# Altium PCB LM25116.PcbDoc
Units mm, origin at the board's own origin, x right, y up, seen from the top; angles counter-clockwise.
Board outline 66.8 x 87.88 mm, 2 copper layers (Top Layer, Bottom Layer); 113 components, 49 nets, 281 pads, 504 vias.
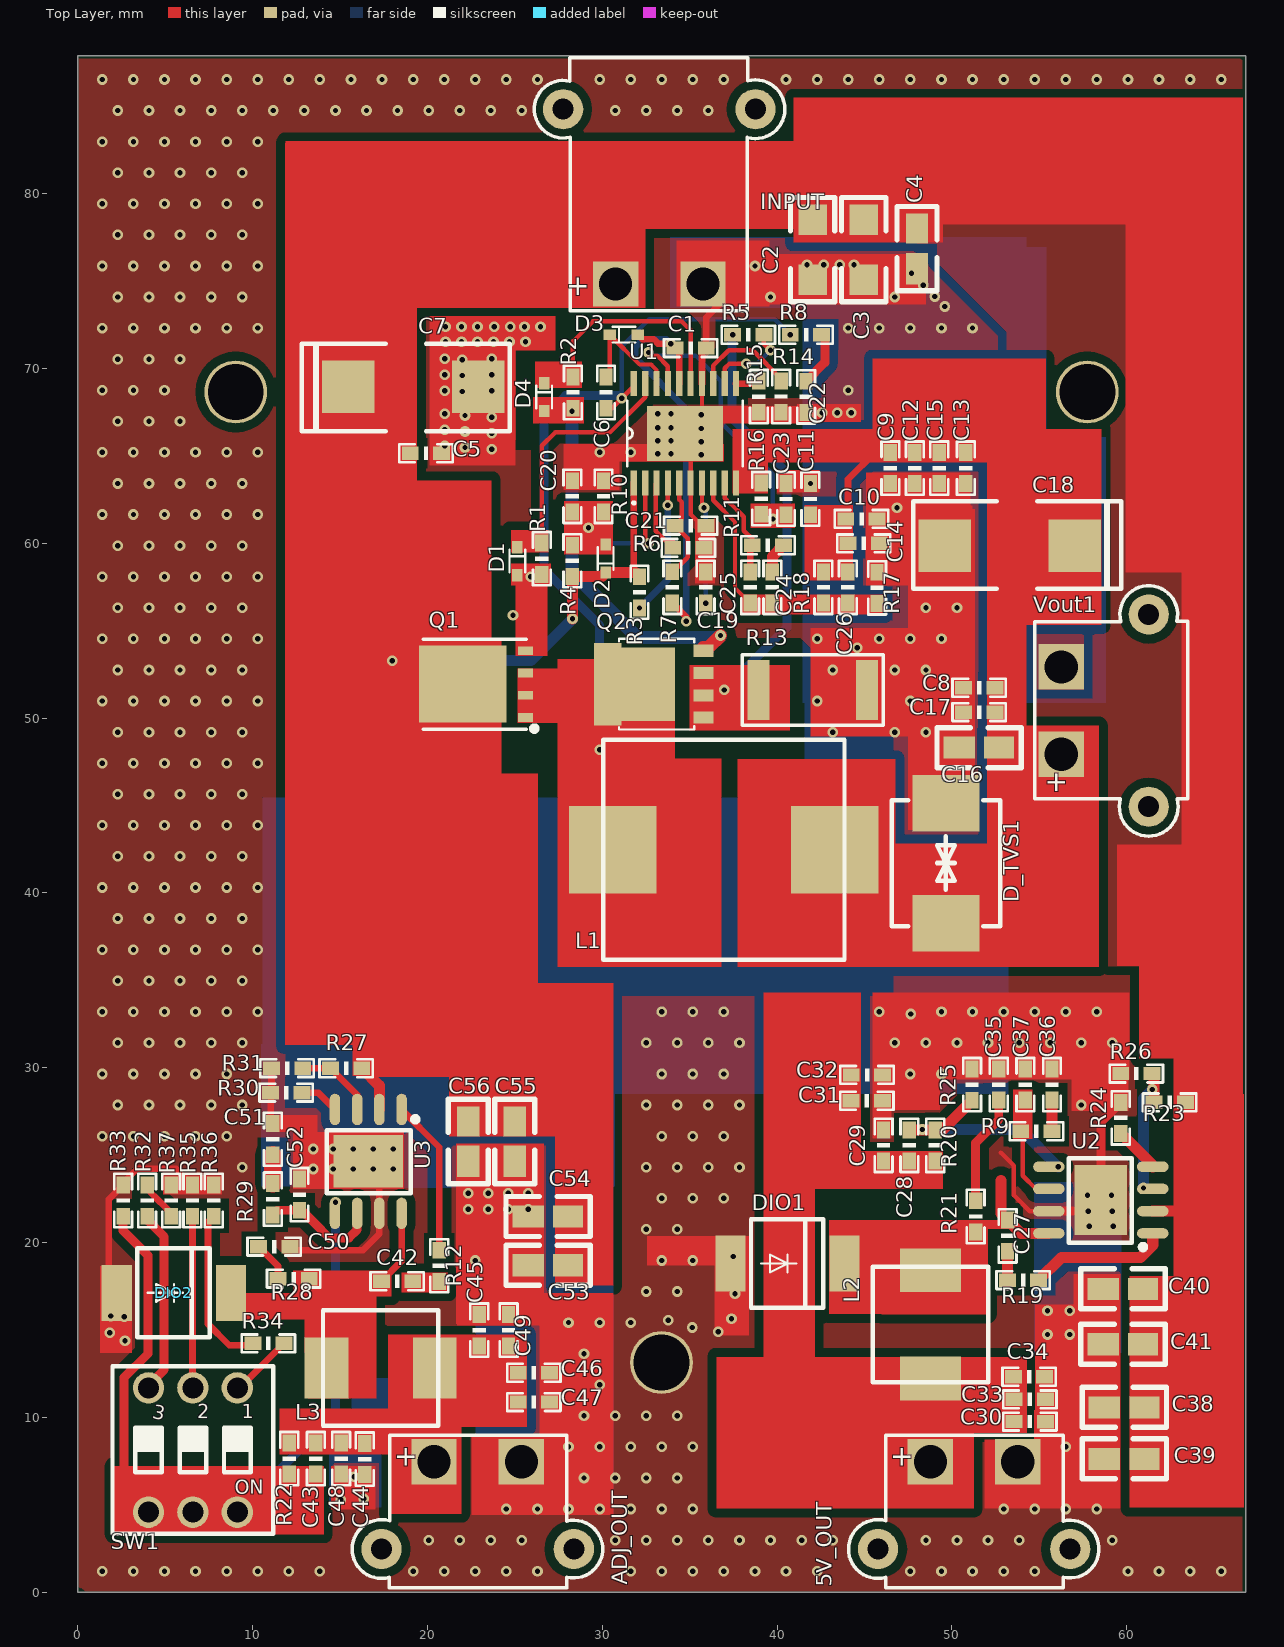
[diagram p0: Top Layer view]
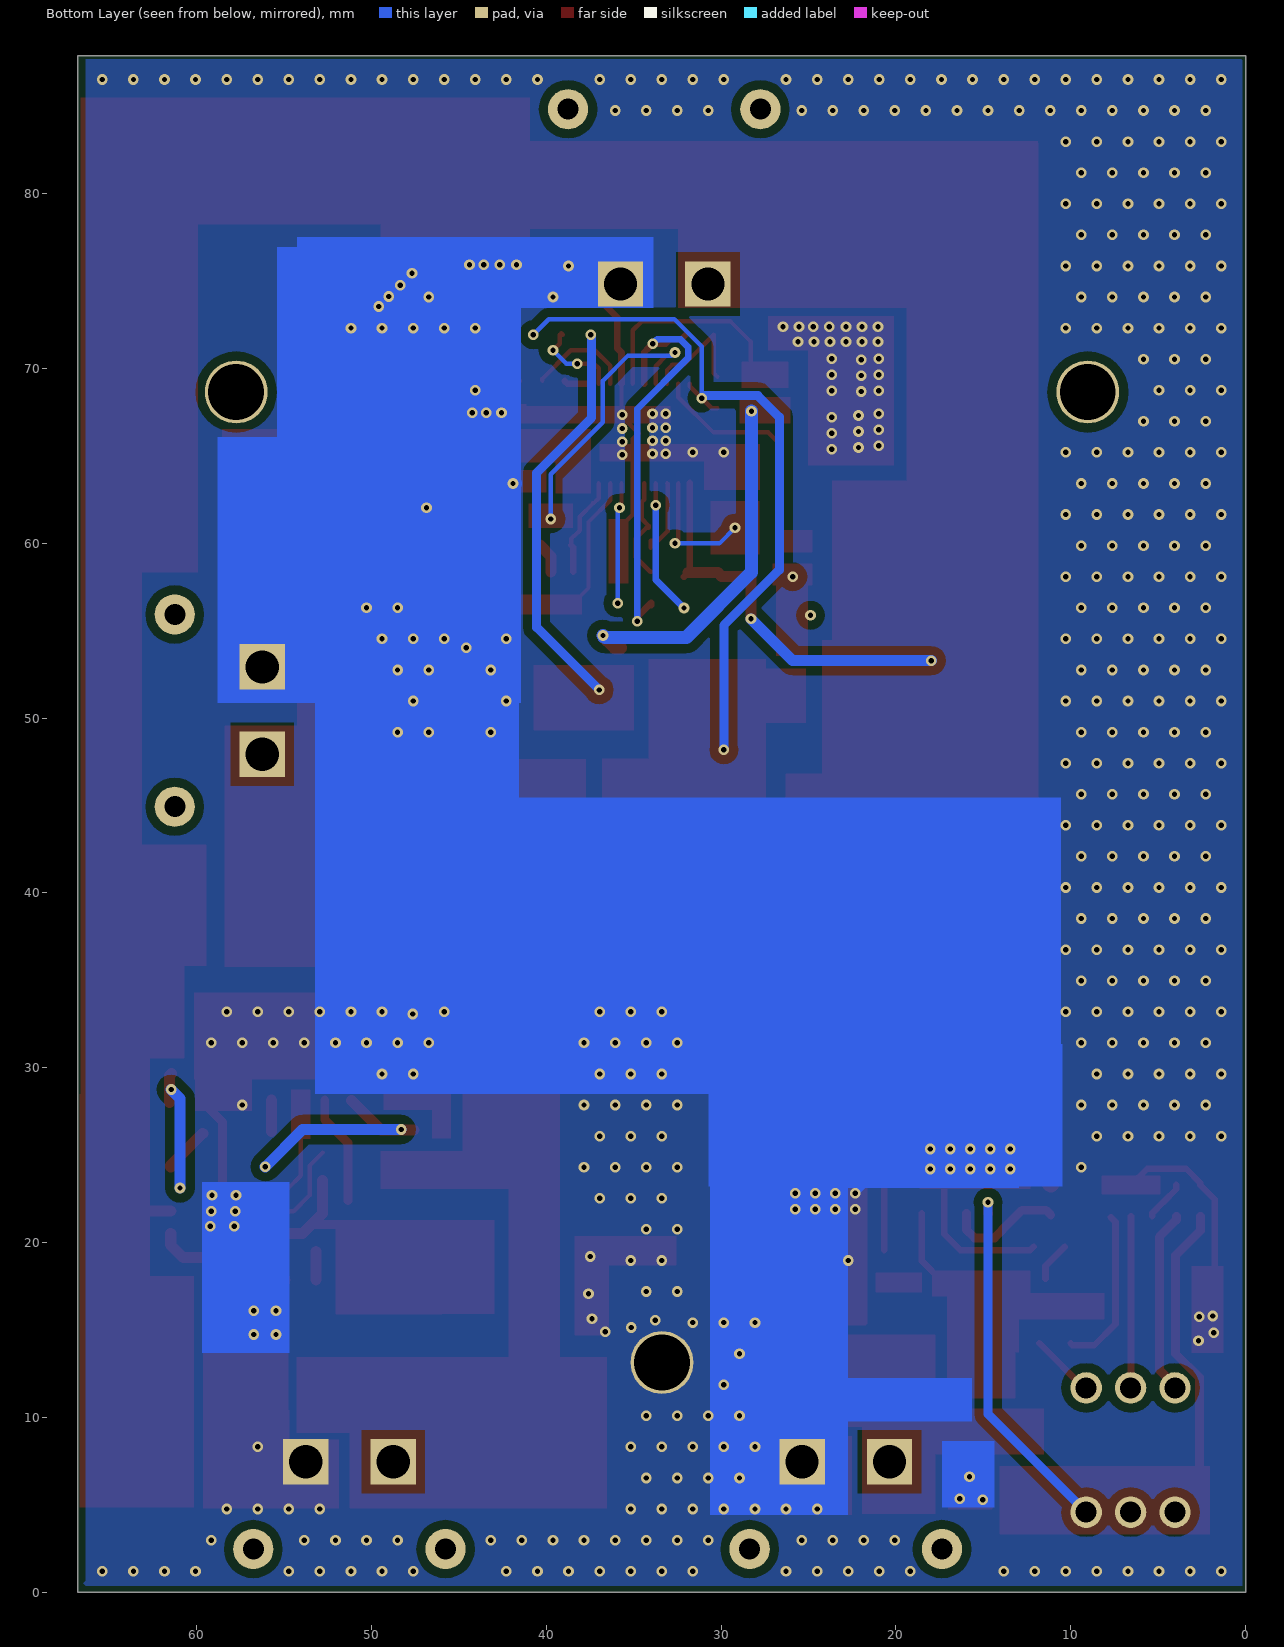
[diagram p1: Bottom Layer view, seen from below]

## Layer stack, top to bottom
Top Solder: solder mask 0.0102, Solder Resist, Dk 3.5
Top Layer: signal copper 0.0356
Dielectric 1: dielectric 0.32, FR-4, Dk 4.8
Bottom Layer: signal copper 0.0356
Bottom Solder: solder mask 0.0102, Solder Resist, Dk 3.5

## Board outline
0,0 66.802,0 66.802,87.884 0,87.884

## Design rules (kind name [scope] priority, off if disabled: settings)
Clearance [InPolygon] p1: gap=0.508 ignorepadtopadclearanceinfootprint=TRUE except(0: Arc-Hole Track-Hole SMDPad-Hole THPad-Hole Via-Hole Fill-Hole Poly-Hole Region-Hole Text-Hole)
Clearance Clearance_1 [All] p2: gap=0.254 ignorepadtopadclearanceinfootprint=TRUE except(0: Arc-Hole Track-Hole SMDPad-Hole THPad-Hole Via-Hole Fill-Hole Poly-Hole Region-Hole Text-Hole)
DiffPairsRouting [All] p1: maxlimit=2.54 minlimit=0.381 mostfreqgap=0.381 toplayer_minwidth=0.254 toplayer_maxwidth=0.762 toplayer_prefwidth=0.508 bottomlayer_minwidth=0.254 bottomlayer_maxwidth=0.762 bottomlayer_prefwidth=0.508 maxuncoupledlength=12.7
PlaneConnect [All] p1: planeconnectstyle=Direct reliefexpansion=0.762 reliefentries=4 reliefconductorwidth=254 reliefairgap=0.508
PolygonConnect [All] p1: connectstyle=Direct reliefconductorwidth=2539.975 reliefentries=4 polygonreliefangle="90 Angle" airgapwidth=0.508
RoutingVias [All] p1: holewidth=0.61 width=1.219 viastyle="Through Hole" minholewidth=0.61 minwidth=1.219 maxholewidth=1.219 maxwidth=2.438
SolderMaskExpansion [All] p1: expansion=0.102
Width [All] p1: maxlimit=2539.975 minlimit=0.254 preferedwidth=0.381
28 further rules are at their usual default settings.

## Components (designator, comment, footprint, x,y, rotation, side; value= is the part's Value field where it differs from the comment)
5V_OUT "Vout" XT30_PW公头 48.768,7.46 r0 top value=N/A (schematic designator Vout3)
ADJ_OUT "Vout" XT30_PW公头 20.371,7.46 r0 top value=N/A (schematic designator Vout4)
C1 "1uF" 0603P 35.052,71.171 r0 top
C2 "4.7uF" 1206 42.037,75.082 r90 top
C3 "4.7uF" 1206 44.958,75.082 r90 top
C4 "1uF" 0805 48.006,75.717 r90 top
C5 "100nF" 0603P 19.914,65.151 r180 top
C6 "1uF" 0603P 30.213,68.631 r270 top
C7 "22uF" 22UF 22.911,68.961 r180 top
C8 "22uF" 0603P 51.562,51.74 r0 top
C9 "22uF" 0603P 46.48,64.303 r90 top
C10 "22uF" 0603P 44.831,61.392 r180 top
C11 "22uF" 0603P 41.91,62.535 r270 top
C12 "22uF" 0603P 47.877,64.303 r90 top
C13 "22uF" 0603P 50.798,64.303 r90 top
C14 "22uF" 0603P 44.958,59.995 r180 top
C15 "22uF" 0603P 49.274,64.303 r90 top
C16 "1uF" 0805 50.419,48.312 r0 top
C17 "100nF" 0603P 51.562,50.343 r0 top
C18 "22uF" 22UF 49.581,59.868 r0 top
C19 "10nF" 0603P 35.911,57.478 r270 top
C20 "1uF" 0603P 28.291,62.685 r270 top
C21 "270pF" 0603P 35.052,61.011 r180 top
C22 "470pF" 0603P 41.656,68.377 r90 top
C23 "1uF" 0603P 40.513,62.535 r270 top
C24 "3.3nF" 0603P 39.731,57.477 r270 top
C25 "100pF" 0603P 38.461,57.477 r270 top
C26 "330pF" 0603P 44.049,57.477 r270 top
C27 "100nF" 0603P 53.186,20.384 r90 top
C28 "470pF" 0603P 47.569,25.552 r270 top
C29 "100nF" 0603P 46.091,25.552 r270 top
C30 "22uF" 0603P 54.458,9.754 r180 top
C31 "22uF" 0603P 45.136,28.107 r180 top
C32 "22uF" 0603P 45.146,29.585 r180 top
C33 "22uF" 0603P 54.458,11.024 r180 top
C34 "22uF" 0603P 54.417,12.317 r180 top
C35 "100pF" 0603P 52.68,29.032 r90 top
C36 "4.7nF" 0603P 55.728,29.032 r90 top
C37 "47pF" 0603P 54.204,29.032 r90 top
C38 "4.7uF" 0805 58.725,10.568 r0 top
C39 "4.7uF" 0805 58.725,7.622 r0 top
C40 "4.7uF" 0805 58.649,17.348 r0 top
C41 "4.7uF" 0805 58.649,14.175 r0 top
C42 "100nF" 0603P 18.263,17.78 r180 top
C43 "470pF" 0603P 13.613,7.635 r90 top
C44 "100nF" 0603P 16.407,7.61 r90 top
C45 "22uF" 0603P 22.962,14.986 r270 top
C46 "22uF" 0603P 26.086,12.546 r180 top
C47 "22uF" 0603P 26.086,10.87 r180 top
C48 "22uF" 0603P 15.059,7.635 r90 top
C49 "22uF" 0603P 24.638,14.986 r270 top
C50 "100pF" 0603P 11.227,19.761 r0 top
C51 "4.7nF" 0603P 11.151,25.908 r90 top
C52 "47pF" 0603P 12.675,22.733 r90 top
C53 "4.7uF" 0805 25.756,18.696 r0 top
C54 "4.7uF" 0805 25.756,21.49 r0 top
C55 "4.7uF" 0805 24.992,24.638 r90 top
C56 "4.7uF" 0805 22.325,24.638 r90 top
D1 "BAS516,115" SOD-523 25.146,58.979 r270 top
D2 "BAS516,115" SOD-523 30.196,59.129 r90 top
D3 "BAS516,115" SOD-523 31.229,71.933 r0 top
D4 "BAS516,115" SOD-523 26.67,68.362 r270 top
D_TVS1 "SMCJ12CA_C310007" TVS 49.657,45.136 r270 top
DIO1 "SK86" SMC(DO-214AB) 40.589,18.796 r0 top
DIO2 "SK86" SMC(DO-214AB) 5.486,17.12 r0 top
INPUT "WB_BATTERY" XT30_PWĸͷ 35.76,74.836 r180 top value=N/A (schematic designator Vin1)
L1 "10uH 10A" "10UH 10A" 30.605,42.47 r0 top
L2 "6.8uH-4.5A" "6.8UH 4.5A" 48.781,18.413 r270 top
L3 "6.8uH-4.5A" "6.8UH 4.5A" 14.221,12.827 r0 top
Q1 "BSC067N06LS3G" BSC067N06LS3G 25.603,50.037 r90 top
Q2 "PSMN1R8-40YLC,115" PSMN1R8-40YLC,115 33.047,51.94 r90 top
R1 "4.7R" 0603P 26.543,59.12 r270 top
R2 "4.7R" 0603P 28.321,68.631 r270 top
R3 "1M" 0603P 32.131,57.201 r270 top
R4 "100K" 0603P 28.291,59.002 r270 top
R5 "0R" 0603P 38.354,71.933 r180 top
R6 "12.4K" 0603P 34.925,59.741 r180 top
R7 "511K" 0603P 34.006,57.478 r90 top
R8 "10R" 0603P 41.656,71.933 r180 top
R9 "17.8K" 0603P 54.839,26.365 r180 top
R10 "10K" 0603P 30.069,62.685 r270 top
R11 "17.8K" 0603P 39.477,59.89 r180 top
R12 "0R" 0603P 20.676,18.669 r270 top
R13 "4mR" LC-2512_L 42.037,51.613 r180 top
R14 "0R" 0603P 40.229,68.4 r270 top
R15 "10K" 0603P 38.958,68.39 r90 top
R16 "0R" 0603P 39.086,62.558 r270 top
R17 "1.21K" 0603P 45.72,57.455 r270 top
R18 "10.7K" 0603P 42.652,57.477 r270 top
R19 "0R" 0603P 54.075,17.844 r180 top
R20 "40.2K" 0603P 49.047,25.552 r270 top
R21 "100R" 0603P 51.359,21.488 r90 top
R22 "40.2K" 0603P 12.089,7.635 r90 top
R23 "309K" 0603P 62.459,28.016 r0 top
R24 "243K" 0603P 59.665,27.127 r270 top
R25 "7.68K" 0603P 51.156,29.032 r270 top
R26 "68K" 0603P 60.554,29.667 r0 top
R27 "309K" 0603P 15.342,29.972 r0 top
R28 "100R" 0603P 12.344,17.932 r180 top
R29 "17.8K" 0603P 11.151,22.479 r270 top
R30 "243K" 0603P 11.913,28.575 r0 top
R31 "68K" 0603P 11.963,29.974 r0 top
R32 "8.2K" 0603P 3.962,22.403 r270 top
R33 "7.68K" 0603P 2.591,22.403 r270 top
R34 "22K" 0603P 10.898,14.234 r0 top
R35 "13.3K" 0603P 6.553,22.403 r270 top
R36 "750R" 0603P 7.772,22.403 r270 top
R37 "1.2K" 0603P 5.334,22.403 r270 top
SW1 "DSWB03LHGET" CH3_SWITCH 5.309,8.382 r180 top
U1 "LM25116" MXA20A 34.727,66.292 r90 top
U2 "TPS54540DDAR" TPS54540 61.493,20.523 r180 top
U3 "TPS54540DDAR" TPS54540 18.517,27.61 r270 top
Vout1 "Vout" XT30_PW公头 56.261,47.93 r90 top value=N/A

## Footprints (in the part's own frame and the unit in brackets; to place one, negate y for a bottom-side part, rotate by r counter-clockwise, add the part's x,y. Pads: shape width x height; smd on the part's side, far side on the other; paste and mask are expansions set on the pad)
"6.8UH 4.5A" [mm]
  rect 2.5x3.5 smd: 1(0,0) 2(6.2,0)
  silkscreen extent -0.2,-3.3 6.4,3.3
"10UH 10A" [mm]
  rect 5x5 smd: 1(0,0) 2(12.702,-0.002)
  silkscreen extent -0.55,-6.3 13.25,6.3
22UF [mil]
  rect 118.07x118.5 smd: 1(293,0) 2(0,0)
  silkscreen extent -71,-97 398,100
0603P [mil]
  rect 37.87x30 smd: 1(-35,0) 2(35.39,-0.06)
  silkscreen extent -60,-20 60,20
0805 [mm]
  rect 1.8x1.27 smd: 1(0,-0.002)
  rect 1.724x1.27 smd: 2(2.286,-0.002)
  silkscreen extent -1.27,-1.14 3.56,1.14
1206 [mil]
  rect 67.87x63.94 smd: 1(0,0) 2(135,0)
  silkscreen extent -50,-50 185,50
BSC067N06LS3G [mm]
  rect 0.5x0.85 smd: 1(0,0) 2(1.27,0) 3(2.541,0) 4(3.811,0)
  rect 4.412x5 smd: 5(1.907,3.577)
  silkscreen extent -0.79,-0.66 4.48,5.85
CH3_SWITCH [mm]
  round 1.8 hole 1.2: 1(-3.81,3.81) 2(-1.27,3.81) 3(1.27,3.81) 4(-3.81,-3.302) 5(-1.27,-3.302) 6(1.27,-3.302)
  silkscreen extent -5.87,-4.55 3.33,5.05
LC-2512_L [mm]
  rect 1.25x3.42 smd: 1(-3.1,0) 2(3.1,0)
  silkscreen extent -4.03,-2.01 4.03,2.01
MXA20A [mil]
  rect 56x14 smd: 1(-112,115.16) 2(-112,89.57) 3(-112,63.98) 4(-112,38.39) 5(-112,12.8) 6(-112,-12.8) 7(-112,-38.39) 8(-112,-63.98) 9(-112,-89.57) 10(-112,-115.16) 11(112,-115.16) 12(112,-89.57) 13(112,-63.98) 14(112,-38.39) 15(112,-12.8) 16(112,12.8) 17(112,38.39) 18(112,63.98) 19(112,89.57) 20(112,115.16)
  rect 124x171 smd: 21(0,0)
  silkscreen extent -160,-130 74,130
PSMN1R8-40YLC,115 [mm]
  rect 0.7x1.15 smd: 1(-1.91,-2.735) 2(-0.64,-2.735) 3(0.64,-2.735) 4(1.91,-2.735)
  rect 4.7x1.55 smd: 5(0,2.735)
  rect 4.2x3.3 smd: 5(0,0.535)
  silkscreen extent -2.6,-2.21 2.6,2.09
SMC(DO-214AB) [mil]
  rect 67.87x126 smd: 1(-128.4,0) 2(128.4,0)
  silkscreen extent -82,-100 81,100
SOD-523 [mm]
  rect 0.7x0.6 smd: 1(-0.8,0) 2(0.8,0)
  silkscreen extent -0.65,-0.45 0.65,0.45
TPS54540 [mm]
  oval 1.8x0.6 smd: 1(0,0) 2(0,-1.27) 3(0,-2.54) 4(0,-3.81) 5(5.944,-3.81) 6(5.944,-2.54) 7(5.944,-1.27) 8(5.944,0)
  rect 3x4 smd: 9(2.972,-1.905)
  silkscreen extent 0.41,-4.29 4.8,0.94
TVS [mm]
  rect 3.23x3.82 smd: 1(0,0) 2(6.87,0)
  silkscreen extent -0.16,-3.11 7.03,3.11
XT30_PWĸͷ [mm]
  round 2.3 hole 1.2: 0(-3,-10) 0(8,-10)
  rect 2.6x2.6 hole 1.9: 1(5,0) 2(0,0)
  silkscreen extent -4.68,-12.95 9.64,1.52
XT30_PW公头 [mm]
  round 2.3 hole 1.2: 0(-3,-5) 0(8,-5)
  rect 2.6x2.6 hole 1.9: 1(0,0) 2(5,0)
  silkscreen extent -4.68,-7.22 9.64,1.52

## Part data
5V_OUT ADJ_OUT Vout1: "BATTERY", Manufacturer Name=WB_BATTERY, Manufacturer Part Number=WB_BATTERY, PackageReference=WB_BATTERY
C1 C2 C3 C4 C5 C6 C8 C9 C10 C11 C12 C13 C14 C15 C16 C17 C19 C20 C21 C22 C23 C24 C25 C26 C27 C28 C29 C30 C31 C32 C33 C34 C35 C36 C37 C38 C39 C40 C41 C42 C43 C44 C45 C46 C47 C48 C49 C50 C51 C52 C53 C54 C55 C56: library part CAP, "Capacitor"
C7 C18: BOM_LCSC Assembly=Yes, BOM_Manufacturer=TORCH, BOM_Manufacturer Part=CA45-D-35V-22μF-K, BOM_Supplier=LCSC, BOM_Supplier Part=C171667, Contributor=LCSC, nameAlias=Capacitance, SMT Type=Extend, spicePre=C, spiceSymbolName=CA45-D-35V-22μF-K
D1 D2 D3 D4: library part D1, Manufacturer Name=Nexperia, Manufacturer Part Number=BAS516,115, PackageReference=BAS516,115
D_TVS1: BOM_Manufacturer="Brightking Elec (TAIWAN)", BOM_Manufacturer Part=SMCJ12CA, BOM_Supplier=LCSC, BOM_Supplier Part=C310007, Contributor=LCSC, spicePre=D
DIO1 DIO2: BOM_LCSC Assembly=Yes, BOM_Manufacturer=MDD, BOM_Manufacturer Part=SK86, BOM_Supplier=LCSC, BOM_Supplier Part=C64338, image=//image.lceda.cn/szlcsc/C64338.jpg, SMT Type=Extend, spicePre=D
INPUT: library part Vin, Manufacturer Name=WB_BATTERY, Manufacturer Part Number=WB_BATTERY, PackageReference=WB_BATTERY
L1 L2 L3: library part L1, "Unknown", Manufacturer Name=Coilcraft, Manufacturer Part Number=MLC1565-372MLB, PackageReference=MLC1565-372MLB
Q1: BOM_Manufacturer=Infineon, BOM_Manufacturer Part=BSC067N06LS3G, BOM_Supplier=LCSC, BOM_Supplier Part=C24199, image=//image.lceda.cn/szlcsc/C24199.jpg, spicePre=Q
Q2: BOM_Manufacturer=Nexperia, BOM_Manufacturer Part=PSMN1R8-40YLC,115, BOM_Supplier=LCSC, BOM_Supplier Part=C88071, spicePre=Q
R1 R2 R3 R4 R5 R6 R7 R8 R9 R10 R11 R12 R13 R14 R15 R16 R17 R18 R19 R20 R21 R22 R23 R24 R25 R26 R27 R28 R29 R30 R31 R33: library part RES, "RES?"
R32 R34 R35 R37: library part RES, "R"
R36: library part RES
SW1: BOM_Manufacturer="Dongguan Guangzhu Industrial", BOM_Manufacturer Part=-, BOM_Supplier=LCSC, BOM_Supplier Part=C99420, Contributor=LCSC, spicePre=S
U2 U3: BOM_LCSC Assembly=Yes, BOM_Manufacturer=TI, BOM_Manufacturer Part=TPS54540DDAR, BOM_Supplier=LCSC, BOM_Supplier Part=C95286, SMT Type=Extend, spicePre=U

## Free pads (board coordinates)
  round 3.6 hole 3.2 unplated: 0(9.029,68.656) 0(57.746,68.656) 3(33.387,13.132)

## Via types
v1: diameter 0.61, hole 0.305, Top Layer to Bottom Layer, tented both sides, 504 vias

## Nets (pads, with @x,y where several pads share a name; then routed paths per layer and width w, separated by ;. In a path a pad name is that pad's centre, name@x,y a point inside that pad or via, vN(x,y) a via of type N, cw(c..) or ccw(c..) an arc to the next point about the centre after c; other vN are vias at no path point)
FB: C28.1 R20.1 R25.2 U2.5 | length 12.9
  Top Layer w0.635: C28.1 49.462,26.441 R25.2
  Bottom Layer w0.635: v1(48.311,26.467) 53.95,26.467 v1(56.083,24.333)
FB_ADJ: C43.1 R22.1 R33.2 SW1.1 SW1.2 SW1.3 U3.5 | length 39.4
  Top Layer w0.508: R33.2 2.589,20.677 4.013,19.253 4.013,13.65 2.631,12.267 2.631,5.98 SW1.3 ; U3.5 14.732,21.641 v1(14.732,22.301)
  Bottom Layer w0.508: SW1.1 14.732,10.185 v1(14.732,22.301)
NetC6_1: C6.1 D3.1 U1.18 | length 6.8
  Top Layer w0.254: C6.1 30.429,69.736 D3.1 32.133,70.229 32.788,70.229 33.102,69.915 U1.18
NetC6_2: C6.2 L1.1 Q1.1 Q1.2 Q1.3 Q2.5 R8.2 U1.20 | length 41.2
  Top Layer w0.254: C6.2 30.545,67.732 v1(31.115,68.302) 31.802,68.99 U1.20
  Bottom Layer w0.254: v1(31.115,68.302) 31.115,71.261 32.676,72.822 39.87,72.822 v1(40.757,71.934)
  Bottom Layer w0.508: v1(29.845,48.184) 29.845,55.302 26.67,58.477 26.67,67.221 27.902,68.453 30.964,68.453 v1(31.115,68.302)
NetC19_2: C19.2 U1.7 | length 7
  Top Layer w0.254: U1.7 35.702,62.138 v1(35.814,62.027)
  Bottom Layer w0.254: v1(35.814,62.027) 35.91,61.931 v1(35.91,56.579)
NetC20_2: C20.2 D2.2 R4.1 R10.2 U1.2 | length 12.9
  Top Layer w0.254: R10.2 C20.2 C20.2 R4.1 28.329,59.929 D2.2 ; U1.2 32.452,60.181 v1(32.639,59.995)
  Bottom Layer w0.254: v1(29.21,60.884) 30.099,59.995 v1(32.639,59.995)
NetC21_2: C21.2 R7.2 U1.5 | length 6.1
  Top Layer w0.254: R7.2 34.062,58.377 34.888,59.204 34.888,60.281 34.275,60.894 34.153,60.894 C21.2 34.544,61.404 34.544,62.361 34.402,62.503 U1.5
NetC22_2: C22.2 R8.1 | length 3.2
  Top Layer w0.508: C22.2 42.731,70.349 42.731,71.746 R8.1
NetC23_2: C23.2 R16.2 U1.17 | length 16.4
  Top Layer w0.254: v1(32.639,70.917) 32.819,70.737 33.153,70.737 33.752,70.138 U1.17
  Bottom Layer w0.254: v1(32.639,70.917) 32.817,70.739 35.331,70.739 36.779,69.291 36.779,66.92 39.751,63.948 v1(39.751,61.392)
NetC24_1: C24.1 R11.1 | length 1.8
  Top Layer w0.635: C24.1 39.731,59.255 R11.1
NetC24_2: C24.2 C25.2 C26.2 R17.2 R18.2 U1.8 | length 7.7
  Top Layer w0.254: U1.8 36.352,62.458 37.592,61.219 37.592,57.445 C25.2
NetC25_1: C25.1 R11.2 U1.9 | length 5.8
  Top Layer w0.254: U1.9 37.002,62.586 37.307,62.281 37.338,62.281 38.1,61.519 38.1,60.726 38.387,60.439 38.417,60.439 38.578,60.278 R11.2
  Top Layer w0.381: C25.1 38.461,59.774 R11.2
NetC27_1: C27.1 R19.2 | length 1.7
  Top Layer w0.635: R19.2 53.176,19.485 C27.1
NetC27_2: C27.2 DIO1.2 L2.1 R21.1 U2.8 | length 5.1
  Top Layer w0.635: 52.807,23.533 52.807,21.664 C27.2 53.947,20.523 U2.8
NetC35_1: C35.1 R21.2 | length 6.3
  Top Layer w0.508: R21.2 51.36,25.706 52.68,27.026 C35.1
NetC36_1: C36.1 R9.1 | length 1.8
  Top Layer w0.635: R9.1 C36.1
NetC37_1: C37.1 R9.2 U2.6 | length 4.4
  Top Layer w0.254: R9.2 54.059,26.247 54.059,23.817 54.813,23.063 U2.6
NetC42_1: C42.1 R12.2 | length 1.6
  Top Layer w0.381: C42.1@19.152,17.907 20.557,17.907 R12.2@20.674,18.024
NetC42_2: C42.2 DIO2.2 L3.1 R28.1 U3.8 | length 10.1
  Top Layer w0.381: R28.1@12.802,17.996 12.802,16.383 12.929,16.256 14.221,14.963 L3.1 ; C42.2 18.517,18.935 U3.8
NetC50_1: C50.1 R28.2 | length 2.3
  Top Layer w0.381: C50.1 11.445,18.654 R28.2
NetC51_1: C51.1 R29.1 | length 1.7
  Top Layer w1.016: R29.1 C51.1
NetC52_1: C52.1 R29.2 U3.6 | length 6.7
  Top Layer w0.508: R29.2 11.413,21.844 C52.1 12.802,21.844 13.899,20.747 13.899,20.732 14.372,20.258 15.504,20.258 15.977,20.731 U3.6
NetD1_1: D1.1 R1.1 U1.19 | length 13.4
  Top Layer w0.254: R1.1 26.543,65.583 27.305,66.345 30.438,66.345 32.452,68.359 U1.19
NetD1_2: D1.2 Q1.4 R1.2 | length 7.5
  Top Layer w0.381: v1(24.892,55.88) 26.111,55.88 26.365,55.626 26.365,54.61 Q1.4 ; v1(25.908,58.09) 25.908,54.864 26.187,54.585 26.365,54.762
NetD4_1: D4.1 R2.1 U1.15 | length 12.5
  Top Layer w0.254: R2.1 28.321,71.552 29.464,72.695 34.544,72.695 35.052,72.186 U1.15
NetD4_2: D4.2 Q2.4 R2.2 | length 20.6
  Top Layer w0.762: Q2.4@35.782,54.031 36.073,54.031 v1(36.767,54.724)
  Bottom Layer w0.762: v1(28.27,67.564) 28.27,58.344 32.004,54.61 36.652,54.61 v1(36.767,54.724)
NetQ2_1: Q2.1 Q2.2 Q2.3 R5.2 R13.2 | length 23.1
  Bottom Layer w0.508: v1(36.982,51.613) 40.564,55.194 40.564,64.033 37.414,67.183 37.414,71.894 v1(37.455,71.934)
NetR3_2: R3.2 U1.4 | length 7.9
  Top Layer w0.254: U1.4 v1(33.752,62.183) v1@33.782,62.154
  Bottom Layer w0.381: v1(32.129,56.302) 33.752,57.925 v1(33.752,62.183)
NetR5_1: R5.1 U1.12 | length 5.1
  Top Layer w0.254: U1.12 37.002,70.011 37.273,70.282 v1(38.227,70.282) ; R5.1@39.052,71.933 R5.1@39.148,72.028 ; R5.1 39.243,71.425 v1(39.624,71.044)
  Bottom Layer w0.254: v1(38.227,70.282) 38.862,70.282 v1(39.624,71.044)
NetR6_2: R6.2 U1.3 | length 4.4
  Top Layer w0.254: U1.3 33.067,63.412 33.067,60.698 33.616,60.149 34.026,60.149 R6.2
NetR12_1: R12.1 U3.1 | length 8.9
  Top Layer w0.381: U3.1 20.676,25.451 R12.1
NetR14_1: R14.1 U1.13 | length 6.1
  Top Layer w0.254: U1.13 36.352,70.17 37.226,71.044 38.606,71.044 40.229,69.42 R14.1
NetR15_2: R15.2 U1.11 | length 1.4
  Top Layer w0.381: U1.11 38.807,69.137 R15.2
NetR19_1: R19.1 U2.1 | length 8
  Top Layer w0.635: R19.1 56.272,19.152 60.788,19.152 61.493,19.857 U2.1
NetR23_1: R23.1 R26.2 U2.3 | length 7.5
  Top Layer w0.635: R26.2 61.57,29.549 R23.1
  Bottom Layer w0.635: v1(60.96,23.114) 60.96,28.245 v1(61.468,28.753)
NetR24_2: R24.2 U2.4 | length 2.7
  Top Layer w0.635: R24.2 61.493,24.398 U2.4
NetR27_1: R27.1 R31.2 U3.3 | length 4.6
  Top Layer w0.381: R31.2 R27.1 15.977,28.448 U3.3
NetR30_2: R30.2 U3.4 | length 2.3
  Top Layer w0.381: R30.2 13.743,28.573 U3.4
NetR32_1: R32.1 R37.2 | length 2.4
  Top Layer w0.381: R32.1 3.962,23.044 4.693,22.314 4.712,22.314 5.332,21.693 R37.2
NetR32_2: R32.2 SW1.6 | length 10.7
  Top Layer w0.508: R32.2 3.961,21.295 4.928,20.328 4.928,12.729 3.961,11.762 SW1.6
NetR34_1: R34.1 R36.2 | length 9.3
  Top Layer w0.381: R36.2@7.72,21.453 7.441,21.174 7.441,15.335 8.654,14.122 9.898,14.122 R34.1
NetR34_2: R34.2 SW1.4 | length 3.7
  Top Layer w0.381: SW1.4 9.249,11.684 R34.2
NetR35_2: R35.2 SW1.5 | length 10.2
  Top Layer w0.381: R35.2 6.552,11.711 SW1.5 SW1.5@6.834,11.94
PGND: 5V_OUT.2 ADJ_OUT.2 C1.2 C2.1 C3.1 C4.1 C5.1 C7.2 C8.1 C9.1 C10.1 C11.1 C12.1 C13.1 C14.1 C15.1 C16.1 C17.1 C18.2 C19.1 C20.1 C21.1 C22.1 C23.1 C29.1 C30.1 C31.1 C32.1 C33.1 C34.1 C35.2 C36.2 C37.2 C38.1 C39.1 C40.1 C41.1 C44.1 C45.1 C46.1 C47.1 C48.1 C49.1 C50.2 C51.2 C52.2 C53.1 C54.1 C55.1 C56.1 D_TVS1.1 DIO1.1 DIO2.1 INPUT.2 pad.3 R6.1 R10.1 R13.1 R14.2 R15.1 R17.1 R24.1 R25.1 R26.1 R30.1 R31.1 R33.1 R35.1 R36.1 R37.1 U1.6 U1.14 U1.21 U2.7 U2.9 U3.7 U3.9 Vout1.2 | length 128
  Top Layer w0.254: U1.14 35.702,67.267 U1.21 35.052,65.967 U1.6 35.052,61.645 35.5,61.198 35.754,61.198 C21.1 ; 52.807,25.133 53.551,24.389 53.551,22.7 54.458,21.793 U2.7
  Top Layer w0.381: DIO2.1 1.764,17.581 1.764,22.465 R33.1 2.591,23.411 3.397,24.217 5.628,24.217 R35.1 ; R31.1 11.074,28.626 R30.1 11.024,26.936 C51.2 12.106,26.807 12.676,26.237 C52.2 ; C50.2 12.326,19.56 16.309,19.56 17.247,20.498 U3.7 17.247,24.003 U3.9 ; U1.14 35.702,70.921 C1.2 35.951,72.933 38.1,75.082 ; INPUT.2@35.76,75.446 47.736,75.446 C4.1 ; R14.2 41.007,67.501 41.148,67.361 41.351,67.564 41.453,67.462 v1(42.57,67.462) v1(43.434,67.462) v1(44.247,67.462)
  Top Layer w0.508: 53.768,5.225 55.306,6.763 55.306,8.814 ; U2.7 57.887,21.793 U2.9 58.522,26.873 R24.1 R26.1
  Bottom Layer w0.381: v1(13.462,25.349) 19.507,25.349 19.66,25.502 v1@22.352,22.809 ; v1(44.247,67.462) 46.863,64.846 v1(46.863,62.027) 47.164,62.027 Vout1.2@55.165,54.026 ; v1(44.577,54.026) Vout1.2@55.165,54.026 ; Vout1.2 Vout1.2@55.165,54.026
  Bottom Layer w1.016: v1(41.91,63.424) 45.466,63.424 v1(46.863,62.027)
  other v1: 1.397,1.194 3.175,1.194 4.953,1.194 6.731,1.194 8.509,1.194 10.287,1.194 12.065,1.194 13.843,1.194 19.177,1.194 20.955,1.194 22.733,1.194 24.511,1.194 26.289,1.194 31.623,1.194 33.401,1.194 35.179,1.194 36.957,1.194 38.735,1.194 40.513,1.194 42.291,1.194 47.625,1.194 49.403,1.194 51.181,1.194 52.959,1.194 54.737,1.194 60.071,1.194 61.849,1.194 63.627,1.194 65.405,1.194 20.066,2.972 21.844,2.972 23.622,2.972 25.4,2.972 30.734,2.972 32.512,2.972 34.29,2.972 36.068,2.972 37.846,2.972 39.624,2.972 41.402,2.972 43.18,2.972 48.514,2.972 50.292,2.972 52.07,2.972 53.848,2.972 59.182,2.972 24.511,4.75 26.289,4.75 28.067,4.75 29.845,4.75 31.623,4.75 33.401,4.75 35.179,4.75 52.959,4.75 54.737,4.75 56.515,4.75 58.293,4.75 15.037,5.283 16.358,5.334 28.956,6.528 30.734,6.528 32.512,6.528 34.29,6.528 15.799,6.604 28.067,8.306 29.845,8.306 31.623,8.306 33.401,8.306 35.179,8.306 56.515,8.306 28.956,10.084 30.734,10.084 32.512,10.084 34.29,10.084 29.845,11.862 28.956,13.64 2.692,14.376 55.474,14.732 56.744,14.732 1.829,14.834 36.627,14.884 35.154,15.138 28.067,15.418 29.845,15.418 31.623,15.418 33.782,15.545 37.389,15.646 2.642,15.748 1.88,15.799 55.474,16.104 56.744,16.104 37.592,17.069 32.512,17.196 34.29,17.196 22.733,18.974 33.401,18.974 35.179,18.974 37.49,19.202 32.512,20.752 34.29,20.752 57.861,20.93 59.233,20.93 57.81,21.793 59.182,21.793 22.327,21.895 23.47,21.895 24.613,21.895 25.756,21.895 33.401,22.53 35.179,22.53 36.957,22.53 57.76,22.708 59.131,22.708 22.327,22.809 23.47,22.809 24.613,22.809 25.756,22.809 13.462,24.206 14.605,24.206 15.748,24.206 16.891,24.206 18.034,24.206 9.398,24.308 32.512,24.308 34.29,24.308 36.068,24.308 37.846,24.308 14.605,25.349 15.748,25.349 16.891,25.349 18.034,25.349 1.397,26.086 3.175,26.086 4.953,26.086 6.731,26.086 8.509,26.086 33.401,26.086 35.179,26.086 36.957,26.086 2.286,27.864 4.064,27.864 5.842,27.864 7.62,27.864 9.398,27.864 32.512,27.864 34.29,27.864 36.068,27.864 37.846,27.864 57.404,27.864 1.397,29.642 3.175,29.642 4.953,29.642 6.731,29.642 8.509,29.642 33.401,29.642 35.179,29.642 36.957,29.642 47.625,29.642 49.403,29.642 2.286,31.42 4.064,31.42 5.842,31.42 7.62,31.42 9.398,31.42 32.512,31.42 34.29,31.42 36.068,31.42 37.846,31.42 46.736,31.42 48.514,31.42 50.292,31.42 52.07,31.42 53.848,31.42 55.626,31.42 57.404,31.42 59.182,31.42 47.65,33.071 1.397,33.198 3.175,33.198 4.953,33.198 6.731,33.198 8.509,33.198 10.287,33.198 33.401,33.198 35.179,33.198 36.957,33.198 45.847,33.198 49.403,33.198 51.181,33.198 52.959,33.198 54.737,33.198 56.515,33.198 58.293,33.198 2.286,34.976 4.064,34.976 5.842,34.976 7.62,34.976 9.398,34.976 1.397,36.754 3.175,36.754 4.953,36.754 6.731,36.754 8.509,36.754 10.287,36.754 2.286,38.532 4.064,38.532 5.842,38.532 7.62,38.532 9.398,38.532 1.397,40.31 3.175,40.31 4.953,40.31 6.731,40.31 8.509,40.31 10.287,40.31 2.286,42.088 4.064,42.088 5.842,42.088 7.62,42.088 9.398,42.088 1.397,43.866 3.175,43.866 4.953,43.866 6.731,43.866 8.509,43.866 10.287,43.866 2.286,45.644 4.064,45.644 5.842,45.644 7.62,45.644 9.398,45.644 1.397,47.422 3.175,47.422 4.953,47.422 6.731,47.422 8.509,47.422 10.287,47.422 2.286,49.2 4.064,49.2 5.842,49.2 7.62,49.2 9.398,49.2 43.18,49.2 46.736,49.2 48.514,49.2 1.397,50.978 3.175,50.978 4.953,50.978 6.731,50.978 8.509,50.978 10.287,50.978 42.291,50.978 47.625,50.978 2.286,52.756 4.064,52.756 5.842,52.756 7.62,52.756 9.398,52.756 43.18,52.756 46.736,52.756 48.514,52.756 1.397,54.534 3.175,54.534 4.953,54.534 6.731,54.534 8.509,54.534 10.287,54.534 42.291,54.534 45.847,54.534 47.625,54.534 49.403,54.534 2.286,56.312 4.064,56.312 5.842,56.312 7.62,56.312 9.398,56.312 48.514,56.312 50.292,56.312 1.397,58.09 3.175,58.09 4.953,58.09 6.731,58.09 8.509,58.09 10.287,58.09 2.286,59.868 4.064,59.868 5.842,59.868 7.62,59.868 9.398,59.868 1.397,61.646 3.175,61.646 4.953,61.646 6.731,61.646 8.509,61.646 10.287,61.646 2.286,63.424 4.064,63.424 5.842,63.424 7.62,63.424 9.398,63.424 35.662,65.075 33.172,65.126 33.934,65.126 1.397,65.202 3.175,65.202 4.953,65.202 6.731,65.202 8.509,65.202 10.287,65.202 29.845,65.202 31.623,65.202 23.673,65.38 22.149,65.481 20.98,65.583 35.662,65.82 33.172,65.871 33.934,65.871 23.673,66.294 22.149,66.396 20.98,66.497 35.662,66.565 33.172,66.616 33.934,66.616 2.286,66.98 4.064,66.98 5.842,66.98 23.673,67.208 22.149,67.31 35.662,67.361 20.98,67.412 33.172,67.412 33.934,67.412 21.996,68.682 20.98,68.732 23.673,68.732 1.397,68.758 3.175,68.758 4.953,68.758 44.069,68.758 21.996,69.596 20.98,69.647 23.673,69.647 21.996,70.51 2.286,70.536 4.064,70.536 5.842,70.536 20.98,70.561 23.673,70.561 21.031,71.526 21.946,71.526 22.86,71.526 23.774,71.526 24.689,71.526 25.603,71.526 1.397,72.314 3.175,72.314 4.953,72.314 6.731,72.314 8.509,72.314 10.287,72.314 44.069,72.314 45.847,72.314 47.625,72.314 49.403,72.314 51.181,72.314 21.031,72.39 21.946,72.39 22.86,72.39 23.825,72.39 24.74,72.39 25.552,72.39 26.467,72.39 49.591,73.548 2.286,74.092 4.064,74.092 5.842,74.092 7.62,74.092 9.398,74.092 39.624,74.092 46.736,74.092 49.016,74.123 48.37,74.769 47.687,75.452 1.397,75.87 3.175,75.87 4.953,75.87 6.731,75.87 8.509,75.87 10.287,75.87 38.735,75.87 41.707,75.946 42.672,75.946 43.586,75.946 44.399,75.946 2.286,77.648 4.064,77.648 5.842,77.648 7.62,77.648 9.398,77.648 1.397,79.426 3.175,79.426 4.953,79.426 6.731,79.426 8.509,79.426 10.287,79.426 2.286,81.204 4.064,81.204 5.842,81.204 7.62,81.204 9.398,81.204 1.397,82.982 3.175,82.982 4.953,82.982 6.731,82.982 8.509,82.982 10.287,82.982 2.286,84.76 4.064,84.76 5.842,84.76 7.62,84.76 9.398,84.76 11.176,84.76 12.954,84.76 14.732,84.76 16.51,84.76 18.288,84.76 20.066,84.76 21.844,84.76 23.622,84.76 25.4,84.76 30.734,84.76 32.512,84.76 34.29,84.76 36.068,84.76 1.397,86.538 3.175,86.538 4.953,86.538 6.731,86.538 8.509,86.538 10.287,86.538 12.065,86.538 13.843,86.538 15.621,86.538 17.399,86.538 19.177,86.538 20.955,86.538 22.733,86.538 24.511,86.538 26.289,86.538 29.845,86.538 31.623,86.538 33.401,86.538 35.179,86.538 36.957,86.538 40.513,86.538 42.291,86.538 44.069,86.538 45.847,86.538 47.625,86.538 49.403,86.538 51.181,86.538 52.959,86.538 54.737,86.538 56.515,86.538 58.293,86.538 60.071,86.538 61.849,86.538 63.627,86.538 65.405,86.538
VCC: C1.1 D3.2 R7.1 U1.16 | length 25.3
  Top Layer w0.381: D3.2 32.312,71.65 32.329,71.666 32.949,71.666 33.191,71.425 v1(33.909,71.425) C1.1 34.402,70.931 U1.16 ; R7.1@34.006,56.468 R7.1 34.798,55.798 v1(34.798,55.55)
  Bottom Layer w0.381: v1(33.909,71.425) 33.668,71.666 32.329,71.666 31.89,71.227 31.89,70.606 34.798,67.698 v1(34.798,55.55)
VCC_5V_ADJ: ADJ_OUT.1 C43.2 C44.2 C45.2 C46.2 C47.2 C48.2 C49.2 L3.2 R22.2 | length 1.7
  Top Layer w0.381: C45.2 C49.2
VCC_5V_U: 5V_OUT.1 C28.2 C29.2 C30.2 C31.2 C32.2 C33.2 C34.2 L2.2 R20.2 | length 3
  Top Layer w0.635: C29.2 C28.2 R20.2
VCC_12V: C8.2 C9.2 C10.2 C11.2 C12.2 C13.2 C14.2 C15.2 C16.2 C17.2 C18.1 C26.1 D_TVS1.2 L1.2 R16.1 R18.1 U1.10 Vout1.1 | length 28.7
  Top Layer w0.381: C11.2 42.652,60.892 R18.1 C26.1 44.049,59.987 C14.2 44.059,63.661 45.599,65.202 C9.2 ; L1.2 47.51,38.266 D_TVS1.2 ; C8.2 C17.2 52.461,48.555 C16.2 55.88,48.311 Vout1.1
VCC_INPUT: C2.2 C3.2 C4.2 C5.2 C7.1 C38.2 C39.2 C40.2 C41.2 C53.2 C54.2 C55.2 C56.2 D2.1 INPUT.1 Q1.5 R3.1 R4.2 R23.2 R27.2 U1.1 U2.2 U3.2 | length 58.9
  Top Layer w0.381: U1.1 31.802,58.418 31.891,58.329 R3.1
  Top Layer w0.635: U3.2 17.247,28.964 R27.2 17.424,31.154 ; 17.424,33.02 17.424,31.154 ; C55.2 C56.2 22.327,28.931 20.103,31.154 17.424,31.154 ; v1(28.296,55.677) 28.29,55.683 R4.2 29.97,58.103 D2.1 R3.1@31.891,58.329 ; C40.2 64.337,17.347 64.795,17.805 64.795,22.403 ; U2.2 64.186,21.793 64.795,22.403 ; R23.2 64.594,28.015 64.795,27.813 64.795,22.403
  Bottom Layer w0.635: v1(17.983,53.289) 25.908,53.289 v1(28.296,55.677)
pads on no net: 5V_OUT.0 ADJ_OUT.0 INPUT.0 Vout1.0

## Polygon pours and split planes (outlines as drawn)
PGND on Top Layer "NONET_L-01_P-001" (solid, remove dead copper, pour order 56): 0.203,0.254 0.406,0.051 66.599,0.051 66.599,87.63 66.497,87.732 0.051,87.732 0.051,0.305 0.305,0.051
VCC_INPUT on Top Layer "NONET_L-01_P-001" (solid, remove dead copper, pour order 44): 53.137,43.576 58.318,38.395 58.318,35.814 65.979,35.814 64.516,37.277 64.516,84.318 41.605,84.318 41.25,83.962 53.137,72.075
PGND on Top Layer "NONET_L-01_P-001" (solid, remove dead copper, pour order 16): 30.226,65.837 32.512,68.123 33.147,67.488 33.147,65.329 30.734,65.329
PGND on Bottom Layer "NONET_L-01_P-001" (solid, remove dead copper, pour order 54): 0.203,0.356 66.345,0.356 66.497,0.508 66.345,0.66 66.345,87.681 0.254,87.681 0.203,87.63

## Other copper
Top Layer:
  region net PGND: 48.514,76.556 34.849,76.556 34.849,73.66 48.514,73.66
  region net PGND: 27.33,73 20.168,73 20.168,71.018 27.33,71.018
  region net NetC42_2: 17.069,18.237 13.157,18.237 13.157,11.074 17.069,11.074
  region net PGND: 44.806,67.97 41.148,67.97 41.148,66.954 44.806,66.954
  region net VCC_INPUT: 66.142,37.541 60.706,37.541 60.706,30.531 66.142,30.531
  region net VCC_INPUT: 66.294,42.774 59.436,42.774 59.436,35.814 66.294,35.814
  region net VCC_INPUT: 66.294,85.496 59.944,85.496 59.944,58.318 66.294,58.318
  region net VCC_INPUT: 66.497,85.496 40.945,85.496 40.945,78.232 66.497,78.232
  region net VCC_INPUT: 66.65,85.496 63.144,85.496 63.144,27.483 66.65,27.483
  region net VCC_12V: 58.42,42.57 37.744,42.57 37.744,35.763 58.42,35.763
  region net VCC_12V: 46.787,47.65 37.744,47.65 37.744,35.763 46.787,35.763
  region net VCC_INPUT: 66.396,31.547 62.687,31.547 62.687,27.483 66.396,27.483
  region net VCC_INPUT: 66.7,28.499 62.687,28.499 62.687,15.951 66.7,15.951
  region net VCC_5V_U: 44.552,13.462 36.525,13.462 36.525,4.775 44.552,4.775
  region net PGND: 59.639,8.738 51.867,8.738 51.867,4.775 59.639,4.775
  region net PGND: 59.639,10.414 54.712,10.414 54.712,4.877 59.639,4.877
  region net VCC_5V_U: 54.305,13.462 43.231,13.462 43.231,9.093 54.305,9.093
  region net VCC_5V_U: 51.257,13.31 37.541,13.31 37.541,4.775 51.257,4.775
  region net VCC_INPUT: 66.7,18.085 60.147,18.085 60.147,4.826 66.7,4.826
  region net PGND: 59.639,16.459 54.762,16.459 54.762,8.28 59.639,8.28
  region net PGND: 59.639,18.186 56.947,18.186 56.947,6.858 59.639,6.858
  region net PGND: 60.147,34.29 45.466,34.29 45.466,29.312 60.147,29.312
  region net PGND: 60.096,31.496 56.845,31.496 56.845,27.534 60.096,27.534
  region net VCC_5V_U: 49.479,25.248 42.672,25.248 42.672,23.063 49.479,23.063
  region net VCC_5V_U: 44.806,34.29 42.672,34.29 42.672,23.063 44.806,23.063
  region net PGND: 46.533,31.445 45.466,31.445 45.466,25.959 46.533,25.959
  region net PGND: 49.327,31.496 45.466,31.496 45.466,27.584 49.327,27.584
  region net PGND: 56.388,31.496 45.466,31.496 45.466,29.362 56.388,29.362
  region net NetC37_1: 54.61,28.753 53.492,28.753 53.492,25.908 54.61,25.908
  region net NetC27_2: 53.543,21.285 51.206,21.285 51.206,20.777 53.543,20.777
  region net PGND: 30.023,17.12 21.692,17.12 21.692,15.24 30.023,15.24
  region net PGND: 30.632,17.12 26.416,17.12 26.416,4.42 30.632,4.42
  region net PGND: 29.312,8.941 22.504,8.941 22.504,4.42 29.312,4.42
  region net NetC42_2: 17.932,18.39 14.732,18.39 14.732,16.916 17.932,16.916
  region net NetC42_2: 15.443,18.39 12.294,18.39 12.294,15.85 15.443,15.85
  region net NetC42_2: 15.494,18.39 12.954,18.39 12.954,13.716 15.494,13.716
  region net PGND: 26.67,25.654 21.641,25.654 21.641,15.342 26.67,15.342
  region net VCC_5V_ADJ: 25.705,14.732 17.729,14.732 17.729,9.449 25.705,9.449
  region net VCC_5V_ADJ: 21.946,14.732 17.729,14.732 17.729,4.47 21.946,4.47
  region net VCC_5V_ADJ: 21.793,10.516 11.532,10.516 11.532,7.874 21.793,7.874
  region net PGND: 17.018,7.214 14.478,7.214 14.478,4.724 17.018,4.724
  region net VCC_5V_ADJ: 16.916,10.16 11.532,10.16 11.532,7.925 16.916,7.925
  region net FB_ADJ: 14.072,7.214 2.032,7.214 2.032,3.302 14.072,3.302
  region net PGND: 13.462,27.28 10.77,27.28 10.77,26.314 13.462,26.314
  region net PGND: 13.716,27.28 12.294,27.28 12.294,25.654 13.716,25.654
  region net PGND: 18.644,26.314 12.294,26.314 12.294,23.063 18.644,23.063
  region net VCC_INPUT: 30.632,30.734 27.28,30.734 27.28,17.526 30.632,17.526
  region net VCC_INPUT: 30.632,34.849 21.234,34.849 21.234,26.06 30.632,26.06
  region net VCC_INPUT: 24.232,52.781 17.882,52.781 17.882,44.399 24.232,44.399
  region net VCC_INPUT: 26.314,46.838 17.12,46.838 17.12,29.464 26.314,29.464
  region net VCC_INPUT: 25.705,31.344 21.234,31.344 21.234,26.314 25.705,26.314
  region net VCC_INPUT: 19.406,33.172 15.697,33.172 15.697,29.515 19.406,29.515
  region net VCC_INPUT: 23.673,63.602 12.192,63.602 12.192,49.53 23.673,49.53
  region net VCC_12V: 54.254,58.979 52.019,58.979 52.019,47.295 54.254,47.295
  region net VCC_12V: 58.42,49.581 52.019,49.581 52.019,36.627 58.42,36.627
  region net VCC_12V: 58.42,42.824 46.431,42.824 46.431,36.627 58.42,36.627
  region net VCC_12V: 46.38,45.11 40.64,45.11 40.64,36.627 46.38,36.627
  region net VCC_12V: 51.664,42.824 40.691,42.824 40.691,36.627 51.664,36.627
  region net VCC_12V: 58.572,66.548 52.019,66.548 52.019,55.321 58.572,55.321
  region net VCC_12V: 55.372,70.561 45.466,70.561 45.466,64.618 55.372,64.618
  region net VCC_12V: 39.472,66.548 37.44,66.548 37.44,62.84 39.472,62.84
  region net VCC_12V: 51.257,66.548 37.897,66.548 37.897,64.618 51.257,64.618
  region net VCC_12V: 44.348,62.179 41.554,62.179 41.554,57.861 44.348,57.861
  region net VCC_12V: 51.257,65.786 45.872,65.786 45.872,64.719 51.257,64.719
  region net VCC_INPUT: 32.461,82.956 28.092,82.956 28.092,78.689 32.461,78.689
  region net VCC_INPUT: 49.479,83.007 28.092,83.007 28.092,77.978 49.479,77.978
  region net VCC_INPUT: 49.479,84.684 40.945,84.684 40.945,77.216 49.479,77.216
  region net PGND: 39.573,77.318 34.239,77.318 34.239,73.558 39.573,73.558
  region net PGND: 25.044,73 20.117,73 20.117,64.465 25.044,64.465
  region net NetD1_2: 26.873,58.725 25.044,58.725 25.044,53.543 26.873,53.543
  region net NetC6_2: 33.833,52.832 25.146,52.832 25.146,49.733 33.833,49.733
  region net VCC_INPUT: 24.232,54.458 11.938,54.458 11.938,49.428 24.232,49.428
  region net PGND: 24.486,70.561 20.168,70.561 20.168,64.618 24.486,64.618
  region net VCC_INPUT: 19.406,82.906 11.836,82.906 11.836,31.293 19.406,31.293
  region net VCC_INPUT: 32.461,83.007 11.887,83.007 11.887,73.457 32.461,73.457
  region net NetC6_2: 34.163,53.391 27.432,53.391 27.432,35.865 34.163,35.865
  region net NetQ2_1: 40.742,53.035 35.001,53.035 35.001,49.301 40.742,49.301
  region net NetC24_2: 46.101,57.074 37.973,57.074 37.973,55.931 46.101,55.931
  region net PGND: 51.308,61.976 47.498,61.976 47.498,43.586 51.308,43.586
  region net PGND: 51.181,62.154 45.085,62.154 45.085,57.582 51.181,57.582
  region net PGND: 51.054,64.059 45.085,64.059 45.085,59.995 51.054,59.995
  region net NetD1_1: 26.924,60.757 24.765,60.757 24.765,59.487 26.924,59.487
  region net NetD1_2: 27.051,58.852 24.765,58.852 24.765,57.582 27.051,57.582
  region net NetC20_2: 30.607,62.408 27.813,62.408 27.813,59.36 30.607,59.36
  region net PGND: 36.449,61.392 35.306,61.392 35.306,57.709 36.449,57.709
  region net NetD4_1: 28.829,70.409 26.162,70.409 26.162,68.885 28.829,68.885
  region net NetD4_2: 28.956,68.377 26.035,68.377 26.035,66.853 28.956,66.853
  region net PGND: 23.724,64.516 23.724,66.548 20.295,66.548 20.295,64.516
  region net PGND: 30.988,65.684 27.788,65.684 27.788,63.043 30.988,63.043
  region net PGND: 36.957,65.684 28.321,65.684 28.321,64.694 36.957,64.694
  region net PGND: 42.037,67.869 32.893,67.869 32.893,66.853 42.037,66.853
  region net NetC23_2: 41.021,62.281 38.481,62.281 38.481,60.884 41.021,60.884
  region net PGND: 42.418,64.186 40.005,64.186 40.005,62.916 42.418,62.916
  region net NetC6_2: 36.83,47.676 27.432,47.676 27.432,35.763 36.83,35.763
  region net PGND: 50.927,55.169 41.91,55.169 41.91,48.946 50.927,48.946
  region net NetC27_2: 52.07,21.285 45.974,21.285 45.974,15.875 52.07,15.875
  region net NetC42_1: 18.517,18.288 18.517,17.145 21.184,17.145 21.184,18.288
  region net NetC27_2: 49.632,21.285 42.977,21.285 42.977,15.9 49.632,15.9
  region net PGND: 38.405,20.371 36.424,20.371 36.424,14.681 38.405,14.681
  region net PGND: 38.405,20.371 32.563,20.371 32.563,18.694 38.405,18.694
  region net VCC_5V_U: 42.164,34.29 39.218,34.29 39.218,4.826 42.164,4.826
  region net VCC_5V_U: 44.806,34.29 39.218,34.29 39.218,23.063 44.806,23.063
  region net NetC42_2: 13.767,17.12 8.077,17.12 8.077,15.596 13.767,15.596
  region net PGND: 8.23,23.825 4.877,23.825 4.877,22.758 8.23,22.758
  region net PGND: 3.099,18.644 1.27,18.644 1.27,13.665 3.099,13.665
  pour cut-out: 26.67,65.329 25.044,65.329 24.74,65.634 25.044,65.938 25.044,73.609 29.515,73.609 29.82,73.304 27.573,71.058 27.573,65.697
  pour cut-out: 30.836,34.392 31.14,34.087 46.685,34.087 46.685,49.149 46.736,49.2 41.326,54.61 28.042,54.61 26.111,52.68 26.264,52.527 26.264,47.65
Bottom Layer:
  region net PGND: 17.374,8.636 14.376,8.636 14.376,4.826 17.374,4.826
  region net PGND: 30.48,12.243 15.646,12.243 15.646,9.754 30.48,9.754
  region net PGND: 30.734,31.344 10.465,31.344 10.465,23.216 30.734,23.216
  region net PGND: 52.68,45.466 10.566,45.466 10.566,28.499 52.68,28.499
  region net PGND: 52.781,41.91 41.504,41.91 41.504,28.651 52.781,28.651
  region net PGND: 53.238,55.118 41.554,55.118 41.554,28.499 53.238,28.499
  region net PGND: 55.423,76.962 41.453,76.962 41.453,50.851 55.423,50.851
  region net PGND: 54.254,77.521 33.884,77.521 33.884,73.457 54.254,73.457
  region net PGND: 58.826,66.091 41.453,66.091 41.453,50.851 58.826,50.851
  region net PGND: 59.69,23.47 54.712,23.47 54.712,13.665 59.69,13.665
  region net PGND: 30.632,25.806 22.758,25.806 22.758,4.42 30.632,4.42
  region net PGND: 26.314,25.806 12.954,25.806 12.954,23.114 26.314,23.114

## Silkscreen, mask and mechanical layers (free items; w line width, h text height)
Mechanical 1:
  the board outline again, w0.152
Drill Drawing:
  lines w0.254: 0,0 12.09,0 58.115,0 66.802,0 66.802,87.884 0,87.884 0,0

## Text inside footprints (layer, text, board x,y; h text height)
5V_OUT: Top Overlay "+" at 46.482,6.825 h2
ADJ_OUT: Top Overlay "+" at 18.085,6.825 h2
INPUT: Top Overlay "+" at 29.283,75.598 h2 r180
SW1: Top Overlay "NO" at 10.643,6.425 h0.8 r180; Top Overlay "1" at 9.373,9.943 h0.8; Top Overlay "2" at 6.826,9.943 h0.8 r359; Top Overlay "3" at 4.209,9.952 h0.8 r348
Vout1: Top Overlay "+" at 56.896,45.644 h2 r90